# Altium PCB ROV_PCB_3.PcbDoc
Units mm, origin at the board's own origin, x right, y up, seen from the top; angles counter-clockwise.
Board outline 70 x 49.5 mm, 2 copper layers (Top Layer, Bottom Layer); 14 components, 21 nets, 93 pads, 0 vias.
Unrouted connection lines stored in the file: 2.
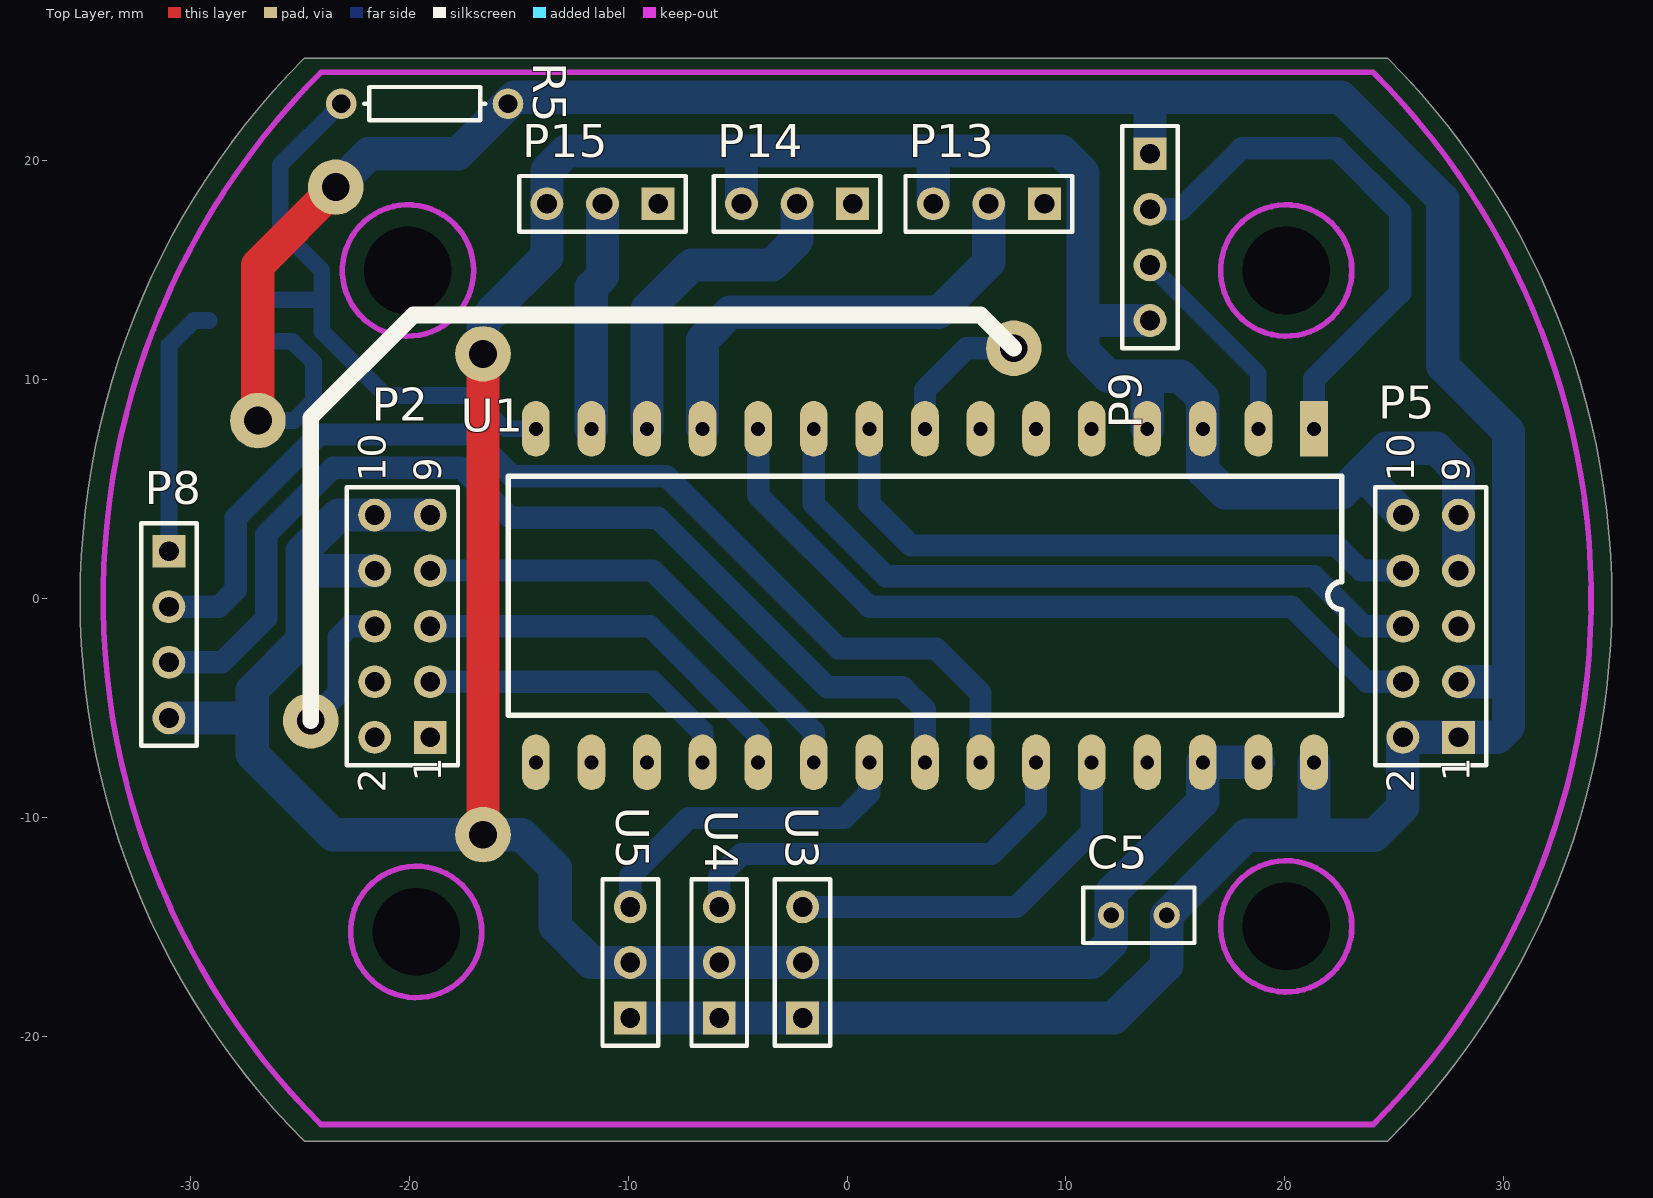
[diagram p0: Top Layer view]
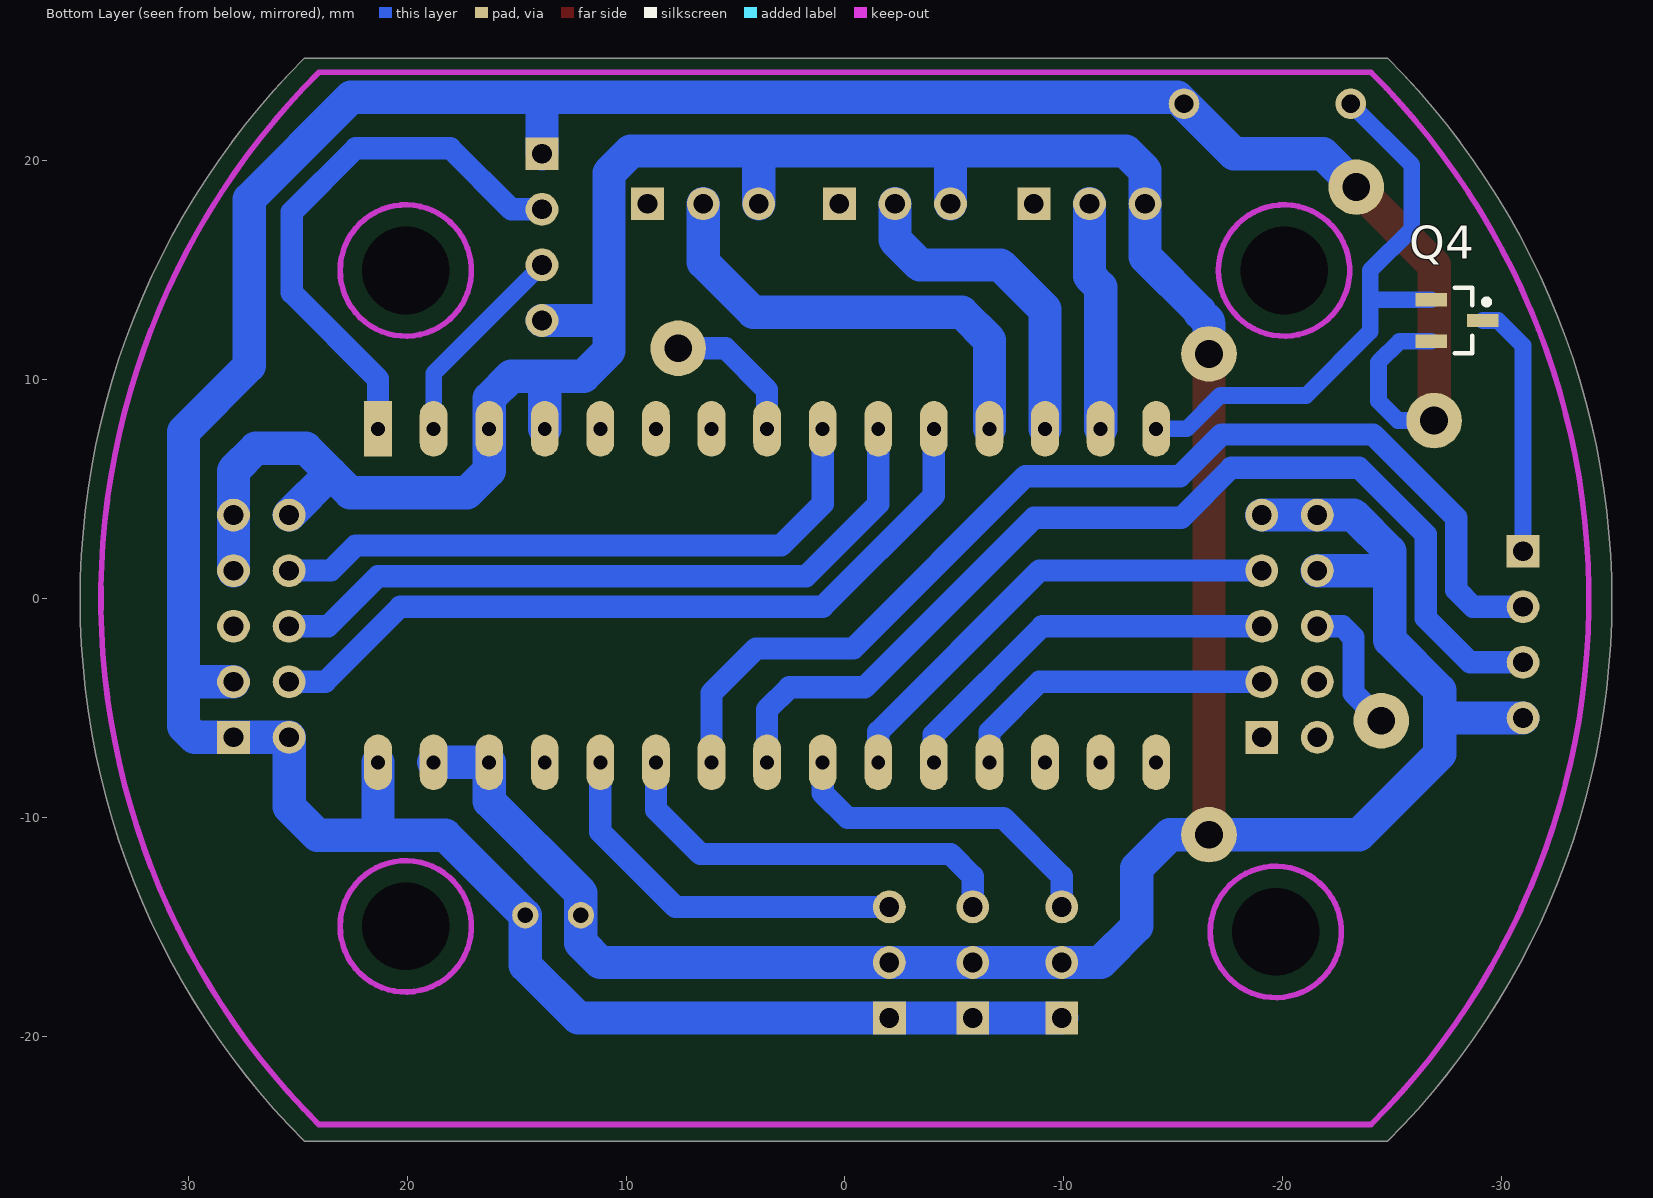
[diagram p1: Bottom Layer view, seen from below]

## Layer stack, top to bottom
Top Solder: solder mask 0.0102, Solder Resist, Dk 3.5
Top Layer: signal copper 0.0356
Dielectric 1: dielectric 0.32, FR-4, Dk 4.8
Bottom Layer: signal copper 0.0356
Bottom Solder: solder mask 0.0102, Solder Resist, Dk 3.5

## Board outline
-24.798,-24.806 24.699,-24.806 ccw(c-0.05,-0.057) 24.699,24.692 -24.798,24.692 ccw(c-0.05,-0.057)

## Design rules (kind name [scope] priority, off if disabled: settings)
Clearance [All] p1: gap=0.254
PolygonConnect [All] p1: connectstyle=Relief reliefconductorwidth=0.254 reliefentries=4 polygonreliefangle="90 Angle" airgapwidth=0.254
RoomDefinition ROV_PCB_3 [InComponentClass('ROV_PCB_3')] p1: confinementstyle=ConfineIn formatcopy=TRUE lockcomponents=FALSE outline 36.068,-23.241 129.032,-23.241 129.032,18.034 36.068,18.034
RoutingVias [All] p1: holewidth=0.711 width=1.27 viastyle="Through Hole" minholewidth=0.711 minwidth=1.27 maxholewidth=0.711 maxwidth=1.27
SolderMaskExpansion [All] p1: expansion=0.102
Width [All] p1: maxlimit=2.032 minlimit=0.254 preferedwidth=1.016 minimp=50.000000 maximp=50.000000 favimp=50.000000
30 further rules are at their usual default settings.

## Components (designator, comment, footprint, x,y, rotation, side; value= is the part's Value field where it differs from the comment)
C5 "1u" RAD-0.1 13.335,-14.478 r0 top
P2 "Header charge" HDR2X5 -19.05,-6.35 r90 top
P5 "Header PWR" HDR2X5 27.94,-6.35 r90 top
P8 "I2C" HDR1X4 -30.988,2.159 r270 top
P9 "Serial" HDR1X4 13.843,20.32 r270 top
P13 "ESC_L header" HDR1X3 9.017,18.034 r180 top
P14 "ESC_R header" HDR1X3 0.254,18.034 r180 top
P15 "ESC_C header" HDR1X3 -8.636,18.034 r180 top
Q4 "Si2307BDS" SOT23_M -27.972,12.7 r180 bottom
R5 "10k" AXIAL-0.3 -19.304,22.606 r0 top
U1 "Arduino_Nano" DIP30 21.336,7.747 r270 top
U3 "LM35" HDR1X3 -2.032,-19.177 r90 top
U4 "LM35" HDR1X3 -5.842,-19.177 r90 top
U5 "LM35" HDR1X3 -9.906,-19.177 r90 top

## Footprints (in the part's own frame and the unit in brackets; to place one, negate y for a bottom-side part, rotate by r counter-clockwise, add the part's x,y. Pads: shape width x height; smd on the part's side, far side on the other; paste and mask are expansions set on the pad)
AXIAL-0.3 [mm] "Axial Device, Thru-Hole; 2 Leads; 0.3 in Pin Spacing"
  round 1.4 hole 0.85: 1(-3.81,0) 2(3.81,0)
  silkscreen extent -2.77,-0.76 2.77,0.76
DIP30 [mm]
  rect 2.54x1.27 hole 0.635: 1(0,0)
  oval 2.54x1.27 hole 0.635: 2(0,-2.54) 3(0,-5.08) 4(0,-7.62) 5(0,-10.16) 6(0,-12.7) 7(0,-15.24) 8(0,-17.78) 9(0,-20.32) 10(0,-22.86) 11(0,-25.4) 12(0,-27.94) 13(0,-30.48) 14(0,-33.02) 15(0,-35.56) 16(15.24,-35.56) 17(15.24,-33.02) 18(15.24,-30.48) 19(15.24,-27.94) 20(15.24,-25.4) 21(15.24,-22.86) 22(15.24,-20.32) 23(15.24,-17.78) 24(15.24,-15.24) 25(15.24,-12.7) 26(15.24,-10.16) 27(15.24,-7.62) 28(15.24,-5.08) 29(15.24,-2.54) 30(15.24,0)
  silkscreen extent 2.16,-36.83 13.08,1.27
HDR1X3 [mm] "Connector; Header; 3 Position"
  rect 1.5x1.5 hole 0.9: 1(0,0)
  round 1.5 hole 0.9: 2(2.54,0) 3(5.08,0)
  silkscreen extent -1.27,-1.27 6.35,1.27
HDR1X4 [mm] "Connector; Header; 4 Position"
  rect 1.5x1.5 hole 0.9: 1(0,0)
  round 1.5 hole 0.9: 2(2.54,0) 3(5.08,0) 4(7.62,0)
  silkscreen extent -1.27,-1.27 8.89,1.27
HDR2X5 [mm] "Connector; Header; 5x2 Position"
  rect 1.5x1.5 hole 0.9: 1(0,0)
  round 1.5 hole 0.9: 2(0,2.54) 3(2.54,0) 4(2.54,2.54) 5(5.08,0) 6(5.08,2.54) 7(7.62,0) 8(7.62,2.54) 9(10.16,0) 10(10.16,2.54)
  silkscreen extent -1.27,-1.27 11.43,3.81
RAD-0.1 [mm] "Radial Cap, Thru-Hole; 2 Leads; 0.1 in Pin Spacing"
  round 1.2 hole 0.7: 1(-1.27,0) 2(1.27,0)
  silkscreen extent -2.54,-1.27 2.54,1.27
SOT23_M [mm] "SOT23, 3-Leads, Body 2.9x1.3mm, Pitch 0.95mm, Lead Span 2.3mm - Reverse Pinning, IPC Low Density"
  rect 1.45x0.6 smd: 1(1.175,0) 2(-1.175,-0.95) 3(-1.175,0.95)
  silkscreen extent -0.1,-1.5 1.47,1.5, body extent -0.7,-1.5 0.7,1.5, height 1.1

## Part data
C5: library part Cap, "Capacitor"
P2 P5: library part "Header 5X2", "Header, 5-Pin, Dual row"
P8 P9: library part "Header 4", "Header, 4-Pin"
P13 P14 P15: library part "Header 3", "Header, 3-Pin"
Q4: library part MOSFET-P, "P-Channel MOSFET"
R5: library part Res1, "Resistor"

## Free pads (board coordinates)
  round 1.27 hole 4: 0(-20.066,14.986) 0(-19.692,-15.24) 0(20.066,-14.986) 0(20.066,14.986)
  round 2.54 hole 1.27: 2(-16.637,11.176) 3(-16.637,-10.795) 4(-26.924,8.128) 5(-23.368,18.796) 6(-24.511,-5.588) 7(7.62,11.43)

## Nets (pads, with @x,y where several pads share a name; then routed paths per layer and width w, separated by ;. In a path a pad name is that pad's centre, name@x,y a point inside that pad or via, vN(x,y) a via of type N, cw(c..) or ccw(c..) an arc to the next point about the centre after c; other vN are vias at no path point)
5V: C5.2 P5.1 P5.2 P5.3 P9.1 pad.4 pad.5 Q4.2 R5.2 U1.30 U3.1 U4.1 U5.1 | length 156.2
  Top Layer w1.524: pad.4 -26.924,15.24 pad.5
  Bottom Layer w0.762: pad.4 -25.273,8.128 -24.384,9.017 -24.384,10.795 -25.339,11.75 Q4.2
  Bottom Layer w1.524: pad.5 -21.844,20.32 -17.78,20.32 -15.201,22.899 13.843,22.899 ; U5.1 U4.1 U3.1 12.192,-19.177 14.605,-16.764 C5.2 18.26,-10.823 24.102,-10.823 25.4,-9.525 P5.2 P5.1 29.718,-6.35 30.226,-5.842 30.226,-3.81 ; P9.1 13.843,22.899 ; 21.336,-10.823 U1.30 ; P5.3 30.226,-3.81 ; 13.843,22.899 22.567,22.899 27.219,18.247 27.219,10.627 30.226,7.62 30.226,-3.81
DGND: C5.1 P2.8 P2.9 P2.10 P5.5 P5.7 P5.9 P5.10 P8.4 P9.4 P13.3 P14.3 P15.3 pad.2 pad.3 U1.3 U1.4 U1.28 U1.29 U3.2 U4.2 U5.2 | length 187.1
  Top Layer w1.524: pad.3 pad.2
  Bottom Layer w1.524: P8.4 -27.178,-5.461 ; P2.8 -24.892,1.27 ; P2.9 P2.10 -23.241,3.81 -24.892,2.159 -24.892,1.27 ; pad.2 -16.637,12.528 -16.605,12.56 -16.605,12.673 -16.22,13.058 -16.22,13.117 -13.716,15.621 P15.3 -13.716,19.558 -12.827,20.447 9.779,20.447 10.783,19.443 10.783,12.7 ; P14.3 -4.826,20.447 ; P13.3 3.937,20.447 ; U1.4 13.716,10.16 ; P9.4 10.783,12.7 ; U1.29 U1.28 16.256,-9.271 12.065,-13.462 C5.1 12.065,-15.748 11.176,-16.637 U3.2 U4.2 U5.2 -11.684,-16.637 -13.335,-14.986 -13.335,-12.319 -14.859,-10.795 pad.3 -23.495,-10.795 -27.178,-7.112 -27.178,-4.191 -24.892,-1.905 -24.892,1.27 ; P5.10 23.495,5.715 ; P5.7 P5.9 27.94,5.842 26.924,6.858 24.638,6.858 23.495,5.715 ; 10.783,12.7 10.783,11.315 11.938,10.16 13.716,10.16 ; 13.716,10.16 15.24,10.16 16.256,9.144 U1.3 16.256,5.842 17.272,4.826 22.606,4.826 23.495,5.715
NetP2_3: P2.3 U1.19 | length 14.8
  Bottom Layer w1.016: P2.3 -8.89,-3.81 -6.604,-6.096 U1.19
NetP2_5: P2.5 U1.20 | length 18.3
  Bottom Layer w1.016: P2.5 -9.017,-1.27 -4.064,-6.223 U1.20
NetP2_6: P2.6 pad.6 pad.7 U1.8 | length 12.8
  Bottom Layer w1.016: pad.6 -23.241,-4.318 -23.241,-1.778 -22.733,-1.27 P2.6 ; U1.8 3.556,9.525 5.461,11.43 pad.7
NetP2_7: P2.7 U1.21 | length 22
  Bottom Layer w1.016: P2.7 -8.89,1.27 -1.524,-6.096 U1.21
NetP5_4: P5.4 U1.11 | length 36
  Bottom Layer w1.016: U1.11 -4.064,4.699 1.016,-0.381 20.32,-0.381 23.749,-3.81 P5.4
NetP5_6: P5.6 U1.10 | length 32.7
  Bottom Layer w1.016: U1.10 -1.524,4.318 1.778,1.016 21.336,1.016 23.622,-1.27 P5.6
NetP5_8: P5.8 U1.9 | length 29.1
  Bottom Layer w1.016: U1.9 1.016,4.318 2.921,2.413 22.352,2.413 23.495,1.27 P5.8
NetP8_1: P8.1 Q4.1 | length 11.7
  Bottom Layer w0.762: P8.1 -30.988,11.557 -29.845,12.7 Q4.1
NetP8_2: P8.2 U1.24 | length 50.3
  Bottom Layer w1.016: P8.2 -28.702,-0.381 -27.94,0.381 -27.94,3.683 -24.13,7.493 -17.216,7.493 -15.311,5.588 -8.255,5.588 -0.381,-2.286 4.064,-2.286 6.096,-4.318 U1.24
NetP8_3: P8.3 U1.23 | length 47.6
  Bottom Layer w1.016: P8.3 -28.575,-2.921 -26.543,-0.889 -26.543,2.921 -23.495,5.969 -17.653,5.969 -15.367,3.683 -8.636,3.683 -0.889,-4.064 2.54,-4.064 3.556,-5.08 U1.23 U1.23@3.429,-7.62
NetP9_2: P9.2 U1.1 | length 25.1
  Bottom Layer w1.016: P9.2 15.24,17.78 18.034,20.574 22.352,20.574 25.273,17.653 25.273,13.97 21.336,10.033 U1.1@21.336,8.001
NetP9_3: P9.3 U1.2 | length 9.8
  Bottom Layer w0.762: P9.3 18.796,10.287 18.796,8.128 U1.2@18.605,7.938
  Bottom Layer w1.016: U1.2@18.796,8.128 U1.2@18.796,8.509
NetP13_2: P13.2 U1.12 | length 21.3
  Bottom Layer w1.524: U1.12 -6.604,11.811 -5.334,13.081 4.191,13.081 6.477,15.367 P13.2
NetP14_2: P14.2 U1.13 | length 15.3
  Bottom Layer w1.524: U1.13 -9.144,13.208 -7.112,15.24 -3.429,15.24 -2.286,16.383 P14.2
NetP15_2: P15.2 U1.14 | length 10.5
  Bottom Layer w1.524: U1.14 -11.684,14.224 -11.176,14.732 P15.2
NetQ4_3: Q4.3 R5.1 U1.15 | length 26.7
  Bottom Layer w0.762: Q4.3 -24.064,13.65 ; R5.1 -25.908,19.812 -25.908,16.891 -24.003,14.986 -24.003,12.192 -21.082,9.271 -17.145,9.271 -15.621,7.747 U1.15
NetU1_22: U1.22 U5.3 | length 15.3
  Bottom Layer w1.016: U5.3 -9.906,-12.7 -7.239,-10.033 -0.127,-10.033 1.016,-8.89 U1.22
NetU1_25: U1.25 U4.3 | length 19.3
  Bottom Layer w1.016: U4.3 -5.842,-12.7 -4.826,-11.684 6.604,-11.684 8.636,-9.652 U1.25
NetU1_26: U1.26 U3.3 | length 17.8
  Bottom Layer w1.016: U3.3 7.747,-14.097 11.176,-10.668 U1.26
pads on no net: P2.1 P2.2 P2.4 P13.1 P14.1 P15.1 U1.5 U1.6 U1.7 U1.16 U1.17 U1.18 U1.27

## Keep-outs
Keep-Out Layer:
  circle w0.254: c-20.066,14.986 r3
  circle w0.254: c20.066,14.986 r3
  circle w0.254: c-19.692,-15.24 r3
  circle w0.254: c20.066,-14.986 r3
  lines w0.254: -24.042,-24.042 cw(c0,0) -24.042,24.042 24.042,24.042 cw(c0,0) 24.042,-24.042 -24.042,-24.042

## Silkscreen, mask and mechanical layers (free items; w line width, h text height)
Top Overlay:
  lines w0.762: -24.511,-5.588 -24.511,8.255 -19.812,12.954 6.096,12.954 7.62,11.43
Mechanical 1:
  lines w0.254: -24.798,-24.806 24.699,-24.806 ; -24.798,24.692 24.699,24.692 ; -24.749,-24.749 cw(c0,0) -24.749,24.749 ; 24.749,-24.749 ccw(c0,0) 24.749,24.749

## Dimensions
20.066,14.986 to 28.067,14.351 on Mechanical 2
-24.798,24.692 to 24.699,24.692 on Mechanical 2
0,0 to -41.536,4.953 on Mechanical 2

## Text inside footprints (layer, text, board x,y; h text height)
P2: Top Overlay "10" at -21.082,5.334 h1.27 r90; Top Overlay "9" at -18.542,5.334 h1.27 r90; Top Overlay "1" at -18.542,-8.382 h1.27 r90; Top Overlay "2" at -21.082,-8.89 h1.27 r90
P5: Top Overlay "10" at 25.908,5.334 h1.27 r90; Top Overlay "9" at 28.448,5.334 h1.27 r90; Top Overlay "1" at 28.448,-8.382 h1.27 r90; Top Overlay "2" at 25.908,-8.89 h1.27 r90